# Altium PCB WiirdFlex Bottom.PcbDoc
Units mm, origin at the board's own origin, x right, y up, seen from the top; angles counter-clockwise.
Board outline 71 x 55 mm, 2 copper layers (Top Layer, Bottom Layer); 21 components, 64 nets, 158 pads, 0 vias.
Unrouted connection lines stored in the file: 31.
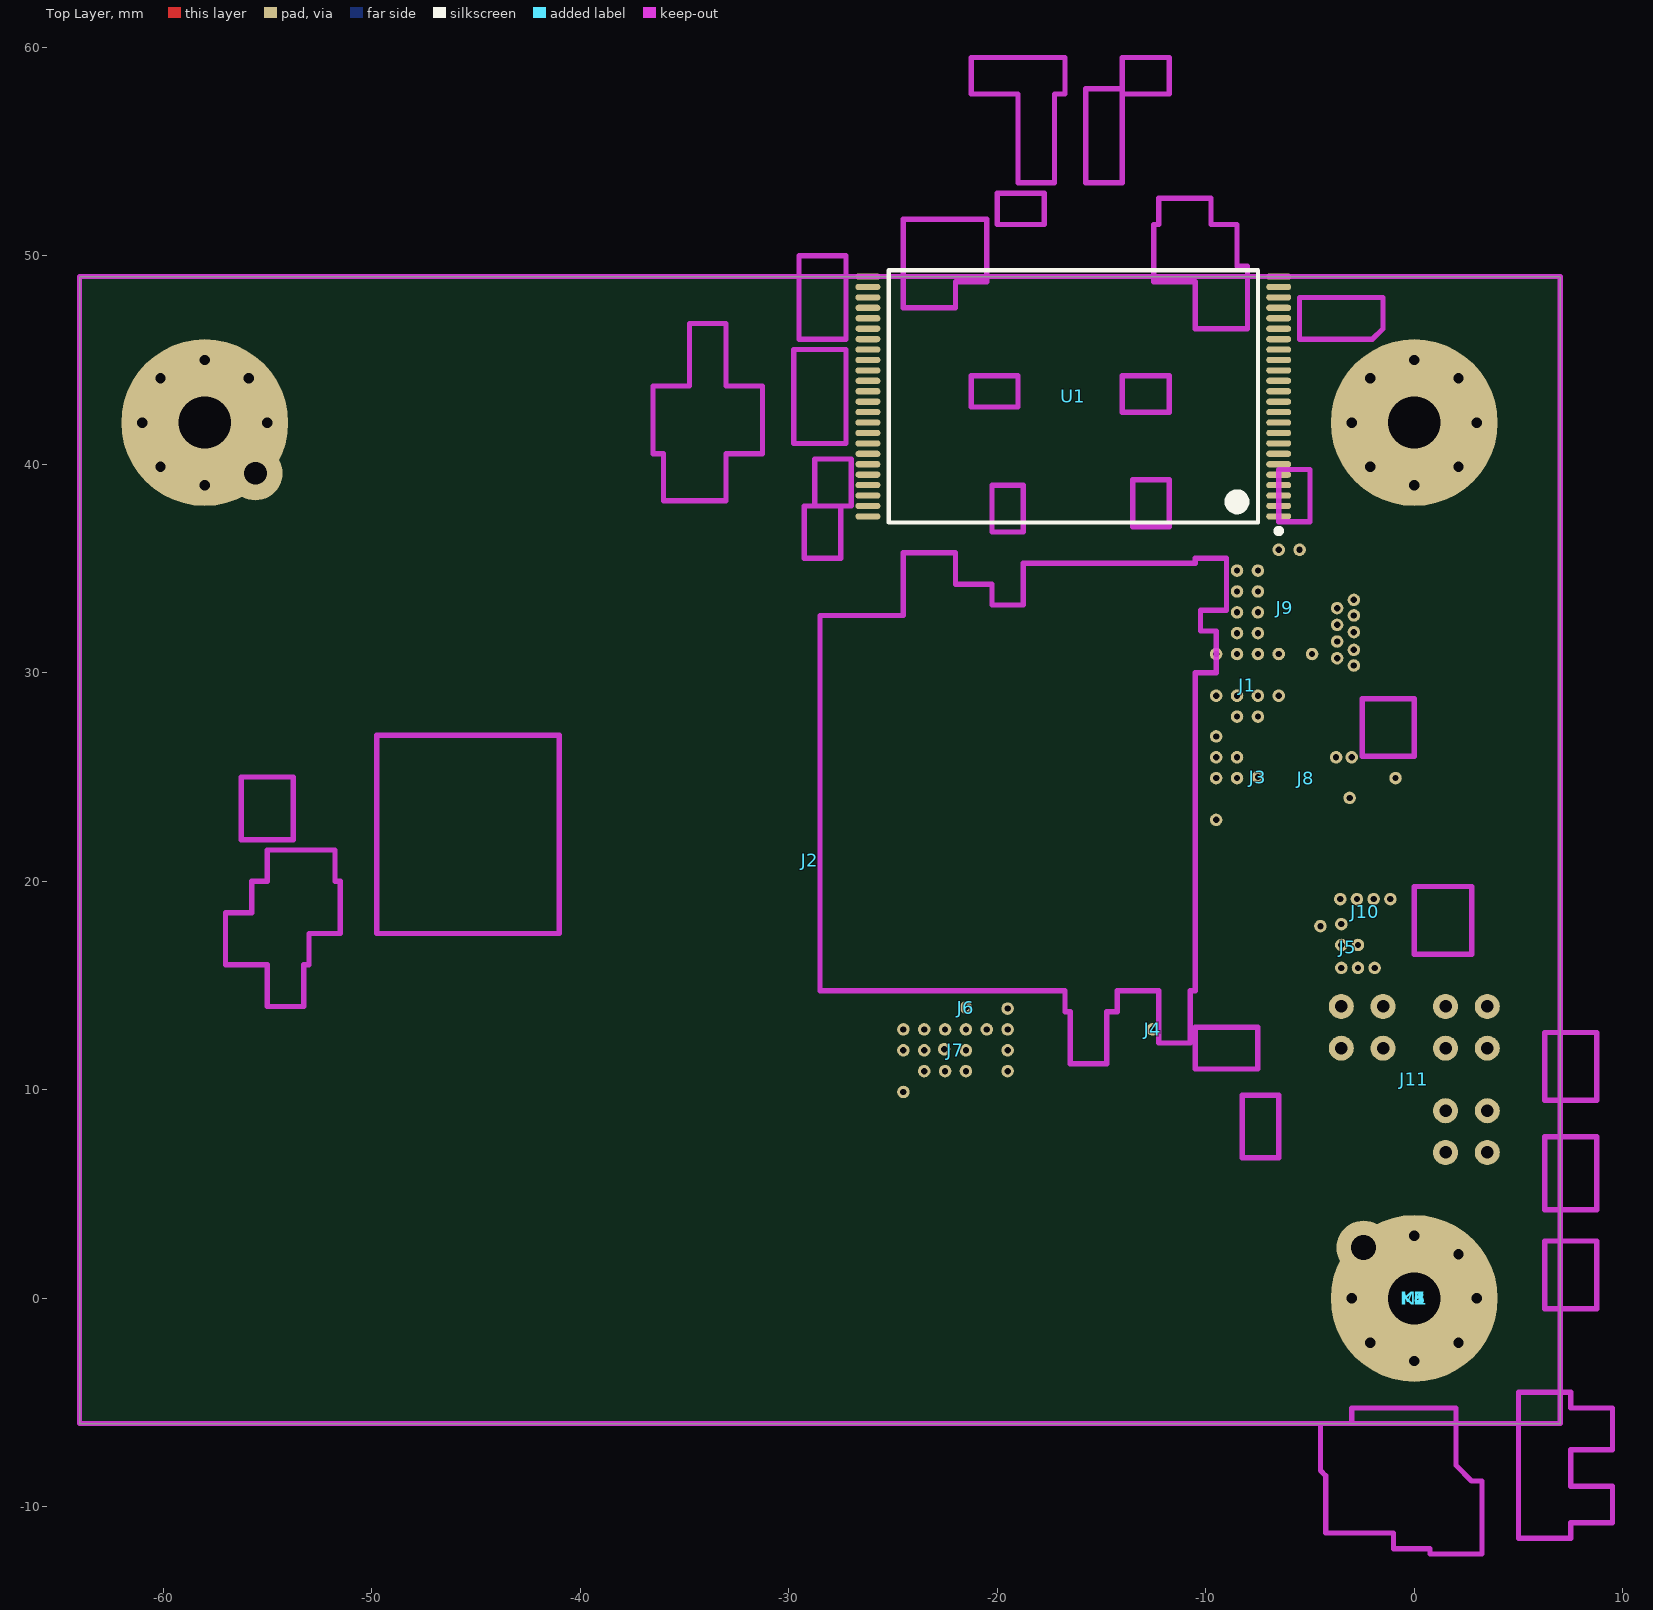
[diagram p0: Top Layer view]
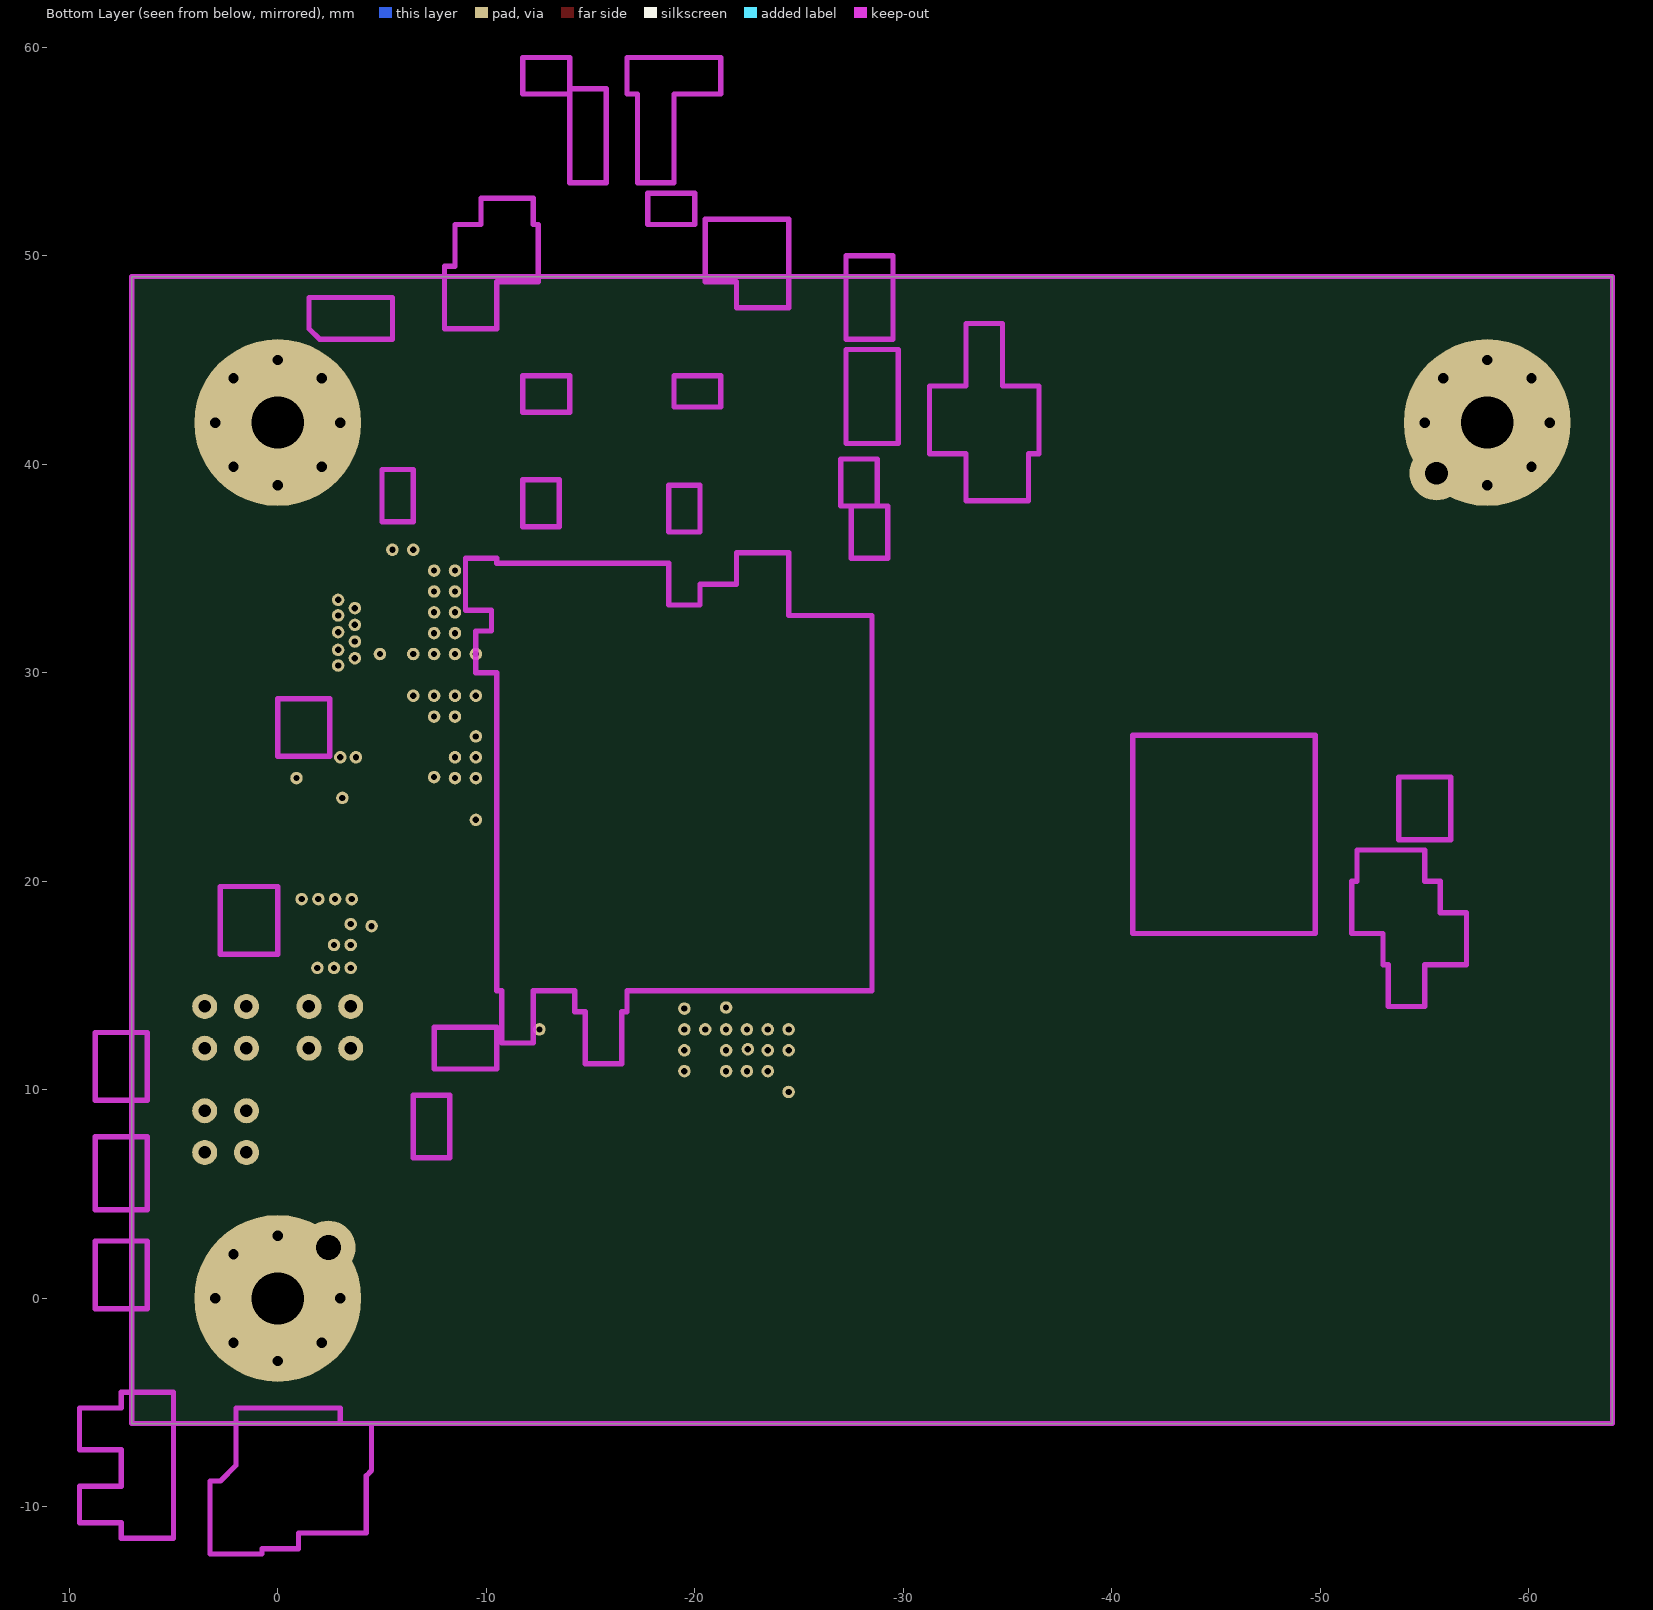
[diagram p1: Bottom Layer view, seen from below]

## Layer stack, top to bottom
Top Solder: solder mask 0.0102, Solder Resist, Dk 3.5
Top Layer: signal copper 0.0356
Dielectric 1: dielectric 0.32, FR-4, Dk 4.8
Bottom Layer: signal copper 0.0356
Bottom Solder: solder mask 0.0102, Solder Resist, Dk 3.5

## Board outline
-64,-6 7,-6 7,49 -64,49

## Design rules (kind name [scope] priority, off if disabled: settings)
Clearance [All] p1: gap=0.254 ignorepadtopadclearanceinfootprint=FALSE except(0: Arc-Hole Track-Hole SMDPad-Hole THPad-Hole Via-Hole Fill-Hole Poly-Hole Region-Hole Text-Hole)
PolygonConnect [All] p1: connectstyle=Relief reliefconductorwidth=0.254 reliefentries=4 polygonreliefangle="90 Angle" airgapwidth=0.254
RoutingVias [All] p1: holewidth=0.711 width=1.27 viastyle="Through Hole" minholewidth=0.711 minwidth=1.27 maxholewidth=0.711 maxwidth=1.27
SolderMaskExpansion [All] p1: expansion=0.102 istentingtop=FALSE
Width [All] p1: maxlimit=0.254 minlimit=0.254 preferedwidth=0.254
30 further rules are at their usual default settings.

## Classes and differential pairs
component class "WiirdFlex Bottom": K1 K2 K3 K4 K5 K6 K7 K8 M1
component class WiFi: J1
component class NAND: J9 U1
component class MX: J8
component class GameCube: J10 J11
component class AV: J6 J7
component class Misc: J2 J3 J4 J5

## Components (designator, comment, footprint, x,y, rotation, side; value= is the part's Value field where it differs from the comment)
J1 "RVK-1_WiFi" RVK-1_WIFI_VIAS 0,0 r0 top
J2 "RVK-1_Ground_MountingScrews" "RVK-1_GND_SCREWS - LMAO WITH EXTRA SCREWPOST" 0,0 r0 top locked
J3 "RVK-1_Reset" RVK-1_RESET 0,0 r0 top locked
J4 "RVK-1_Fan" RVK-1_FAN_PWM 0,0 r0 top
J5 "RVK-1_TestPoints" RVK-1_TESTPOINT_VIAS 0,0 r0 top
J6 "RVK-1_Video_Mode" RVK-1_VIDEO_MODE_VIA 0,0 r0 top
J7 "RVK-1_AVE_Relocation" RVK-1_AVE_VIAS 0,0 r0 top
J8 "RVK-1_MX_Relocation" RVK-1_MX 0,0 r0 top
J9 "RVK-1_NAND_Relocation" RVK-1_NAND_VIAS 0,0 r0 top
J10 "RVK-1_GameCube_Ports" RVK-1_GC_CONTROLLER_VIAS 0,0 r0 top locked
J11 "RVK-1_GameCube_MemoryCards" RVK-1_MEMCARD_TESTPOINTS 0,0 r0 top
K1 "Keepout: CPU" RVK-1_BOTTOM_KEEPOUT_CPU 0,0 r0 top locked
K2 "Keepout: GPU" RVK-1_BOTTOM_KEEPOUT_GPU 0,0 r0 top locked
K3 "Keepout: RAM" RVK-1_Bottom_Keepout_RAM 0,0 r0 top locked
K4 "Keepout: SD pull-ups" RVK-1_Bottom_Keepout_SD_Pullups 0,0 r0 top locked
K5 "Keepout: Controller pull-ups" RVK-1_Bottom_Keepout_Controller_Pullups 0,0 r0 top locked
K6 "Keepout: Mem card ESD protection" RVK-1_Bottom_Keepout_MemCard_ESD 0,0 r0 top locked
K7 "Keepout: USB ESD protection" RVK-1_Bottom_Keepout_USB_ESD 0,0 r0 top locked
K8 "Keepout: Fan power" RVK-1_Bottom_Keepout_Fan_Power 0,0 r0 top locked
M1 "Trim: LMAO (JL version)" "Wii Trim: LMAO with extra mounting hole" 0,0 r0 top locked
U1 "HY27UF082G2B" TSSOP50P2000X120-48N -16.35,43.25 r180 top

## Footprints (in the part's own frame and the unit in brackets; to place one, negate y for a bottom-side part, rotate by r counter-clockwise, add the part's x,y. Pads: shape width x height; smd on the part's side, far side on the other; paste and mask are expansions set on the pad)
RVK-1_AVE_VIAS [mm]
  round 0.6 hole 0.3: 1(-24.5,11.9) 2(-23.5,12.9) 3(-23.5,10.9) 6(-23.5,11.9) 7(-22.5,12.9) 8(-22.5,10.9) 11(-22.544,11.951) 13(-21.5,12.9) 14(-21.5,10.9) 19(-21.5,11.9) 20(-20.5,12.9) 25(-19.5,12.9) 27(-19.5,10.9) 29(-19.5,11.9) 31(-19.5,13.9) 64(-24.5,9.9) G(-24.5,12.9)
RVK-1_Bottom_Keepout_Controller_Pullups [mm] "Keepout area for GC Controller pull-up resistor array (RA1)"
  Keep-Out Layer lines w0.254: 0,16.5 2.75,16.5 2.75,19.75 0,19.75 0,16.5
RVK-1_BOTTOM_KEEPOUT_CPU [mm] "keepout area for various CPU-associated components (mostly power filtering)"
  Keep-Out Layer lines w0.254: -57,16 -57,18.5 -55.75,18.5 -55.75,20 -55,20 -55,21.5 -51.75,21.5 -51.75,20 -51.5,20 -51.5,17.5 -53,17.5 -53,16 -53.25,16 -53.25,14 -55,14 -55,16 -57,16 ; -56.25,22 -56.25,25 -53.75,25 -53.75,22 -56.25,22 ; -49.75,17.5 -41,17.5 -41,27 -49.75,27 -49.75,17.5
RVK-1_Bottom_Keepout_Fan_Power [mm] "keepout area for fan control and power components"
  Keep-Out Layer lines w0.254: -4.5,-8.25 -4.5,-6 -3,-6 -3,-5.25 2,-5.25 2,-8 2.75,-8.75 3.25,-8.75 3.25,-12.25 0.75,-12.25 0.75,-12 -1,-12 -1,-11.25 -4.25,-11.25 -4.25,-8.5 -4.5,-8.25
RVK-1_BOTTOM_KEEPOUT_GPU [mm] "Keep-out area for Wii bottom side of GPU, including related support components"
  Keep-Out Layer lines w0.254: -36.5,40.5 -36,40.5 -36,38.25 -33,38.25 -33,40.5 -31.25,40.5 -31.25,43.75 -33,43.75 -33,46.75 -34.75,46.75 -34.75,43.75 -36.5,43.75 -36.5,40.5 ; -29.75,41 -29.75,45.5 -27.25,45.5 -27.25,41 -29.75,41 ; -29.5,46 -29.5,50 -27.25,50 -27.25,46 -29.5,46 ; -29.25,35.5 -29.25,38 -27.5,38 -27.5,35.5 -29.25,35.5 ; -28.75,38 -28.75,40.25 -27,40.25 -27,38 -28.75,38 ; -28.5,14.75 -16.75,14.75 -16.75,13.75 -16.5,13.75 -16.5,11.25 -14.75,11.25 -14.75,13.75 -14.25,13.75 -14.25,14.75 -12.25,14.75 -12.25,12.25 -10.75,12.25 -10.75,14.75 -10.5,14.75 -10.5,30 -9.5,30 -9.5,32 -10.25,32 -10.25,33 -9,33 -9,35.5 -10.5,35.5 -10.5,35.25 -18.75,35.25 -18.75,33.25 -20.25,33.25 -20.25,34.25 -22,34.25 -22,35.75 -24.5,35.75 -24.5,32.75 -28.5,32.75 -28.5,14.75 ; -20.25,36.75 -18.75,36.75 -18.75,39 -20.25,39 -20.25,36.75 ; -13.5,37 -11.75,37 -11.75,39.25 -13.5,39.25 -13.5,37 ; -10.5,11 -10.5,13 -7.5,13 -7.5,11 -10.5,11 ; -8.25,6.75 -6.5,6.75 -6.5,9.75 -8.25,9.75 -8.25,6.75 ; -6.5,37.25 -5,37.25 -5,39.75 -6.5,39.75 -6.5,37.25
RVK-1_Bottom_Keepout_MemCard_ESD [mm] "Keepout area for GC Memory Card ESD-protection diode arrays (DA1, DA2, DA4)"
  Keep-Out Layer lines w0.254: 6.25,-0.5 6.25,2.75 8.75,2.75 8.75,-0.5 6.25,-0.5 ; 6.25,4.25 6.25,7.75 8.75,7.75 8.75,4.25 6.25,4.25 ; 6.25,9.5 6.25,12.75 8.75,12.75 8.75,9.5 6.25,9.5
RVK-1_Bottom_Keepout_RAM [mm] "keepout area for RAM-related support components (power conditioning, mainly)"
  Keep-Out Layer lines w0.254: -24.5,47.5 -22,47.5 -22,48.75 -20.5,48.75 -20.5,51.75 -24.5,51.75 -24.5,47.5 ; -21.25,42.75 -19,42.75 -19,44.25 -21.25,44.25 -21.25,42.75 ; -21.25,57.75 -21.25,59.5 -16.75,59.5 -16.75,57.75 -17.25,57.75 -17.25,53.5 -19,53.5 -19,57.75 -21.25,57.75 ; -20,51.5 -17.75,51.5 -17.75,53 -20,53 -20,51.5 ; -15.75,53.5 -15.75,58 -14,58 -14,53.5 -15.75,53.5 ; -14,42.5 -11.75,42.5 -11.75,44.25 -14,44.25 -14,42.5 ; -14,57.75 -14,59.5 -11.75,59.5 -11.75,57.75 -14,57.75 ; -12.5,48.75 -12.5,51.5 -12.25,51.5 -12.25,52.75 -9.75,52.75 -9.75,51.5 -8.5,51.5 -8.5,49.5 -8,49.5 -8,46.5 -10.5,46.5 -10.5,48.75 -12.5,48.75 ; -5.5,46 -5.5,48 -1.5,48 -1.5,46.5 -2,46 -5.5,46
RVK-1_Bottom_Keepout_SD_Pullups [mm] "Keep-out area for SD card detect and write protect pull-up resistors (R200, R201)"
  Keep-Out Layer lines w0.254: -2.5,26 0,26 0,28.75 -2.5,28.75 -2.5,26
RVK-1_Bottom_Keepout_USB_ESD [mm] "Keepout area for USB ESD protection diodes on bottom side"
  Keep-Out Layer lines w0.254: 5,-11.5 5,-4.5 7.5,-4.5 7.5,-5.25 9.5,-5.25 9.5,-7.25 7.5,-7.25 7.5,-9 9.5,-9 9.5,-10.75 7.5,-10.75 7.5,-11.5 5,-11.5
RVK-1_FAN_PWM [mm] "Via controlling fan from GPU.  Don't know if it's actually PWM or not, just guessing."
  round 0.6 hole 0.3: 1(-12.55,12.9)
RVK-1_GC_CONTROLLER_VIAS [mm]
  round 0.6 hole 0.3: 1(-1.95,19.15) 2(-1.15,19.15) 3(-2.75,19.15) 4(-3.55,19.15) G(-3.5,17.95)
"RVK-1_GND_SCREWS - LMAO WITH EXTRA SCREWPOST" [mm]
  round 1 hole 0.5: 1(-61,42) 1(-60.121,39.879) 1(-60.121,44.121) 1(-58,39) 1(-58,45) 1(-55.879,44.121) 1(-55,42) 1(-3,0) 1(-3,42) 1(-2.121,-2.121) 1(-2.121,39.879) 1(-2.121,44.121) 1(0,-3) 1(0,3) 1(0,39) 1(0,45) 1(2.121,-2.121) 1(2.121,2.121) 1(2.121,39.879) 1(2.121,44.121) 1(3,0) 1(3,42)
  round 8 hole 2.5: 1(-58,42) 1(0,0) 1(0,42)
  round 2.6 hole 1.1: 1(-55.568,39.568)
  round 2.6 hole 1.2: 1(-2.432,2.432)
RVK-1_MEMCARD_TESTPOINTS [mm] "Don't need these signals but they may be useful for mechanical attachment points"
  round 1.2 hole 0.6: 1(-3.5,14) 2(-1.5,14) 3(1.5,14) 4(3.5,14) 5(-3.5,12) 6(-1.5,12) 7(1.5,12) 8(3.5,12) 9(1.5,9) 10(3.5,9) 11(1.5,7) 12(3.5,7)
RVK-1_MX [mm] "Vias where the MX chip attaches to CPU and/or GPU on the bottom of a 4-layer Wii motherboard"
  round 0.6 hole 0.3: 5(-0.9,24.95) 7(-9.5,25.95) 11(-8.5,25.95) 12(-3,25.95) 13(-3.75,25.95) 14(-9.5,26.95) 15(-9.5,22.95) 20(-9.5,24.95) 24(-8.5,24.95) G(-3.1,24)
RVK-1_NAND_VIAS [mm]
  round 0.6 hole 0.3: 3.3V(-5.5,35.9) 6(-2.9,30.35) 7(-3.7,30.7) 8(-2.9,31.1) 9(-3.7,31.5) 10(-2.9,31.95) 16(-3.7,32.3) 17(-2.9,32.75) 18(-3.7,33.1) 19(-2.9,33.5) 29(-8.5,34.9) 30(-7.5,34.9) 31(-8.5,33.9) 32(-7.5,33.9) 41(-8.5,32.9) 42(-7.5,32.9) 43(-8.5,31.9) 44(-7.5,31.9) G(-9.5,30.9) G(-8.5,30.9) G(-7.5,30.9) G(-6.5,35.9) G(-4.9,30.9)
RVK-1_RESET [mm]
  round 0.6 hole 0.3: 1(-7.5,25)
RVK-1_TESTPOINT_VIAS [mm] "Vias near GPU associated with some test points on top layer"
  round 0.6 hole 0.3: 219(-2.7,16.95) 220(-4.5,17.85) 221(-3.5,16.95) 223(-3.5,15.85) 224(-2.7,15.85) 225(-1.9,15.85)
RVK-1_VIDEO_MODE_VIA [mm]
  round 0.6 hole 0.3: 1(-21.5,13.95)
RVK-1_WIFI_VIAS [mm]
  round 0.6 hole 0.3: 2(-6.5,30.9) 3(-9.5,28.9) 5(-8.5,28.9) 16(-7.5,27.9) 17(-8.5,27.9) 19(-6.5,28.9) G(-7.5,28.9)
TSSOP50P2000X120-48N [mm] "TSSOP, 48-Leads, Body 12.02x18.40mm, Pitch 0.50mm, IPC Medium Density"
  oval 1.2x0.3 smd: 1(-9.85,5.75) 2(-9.85,5.25) 3(-9.85,4.75) 4(-9.85,4.25) 5(-9.85,3.75) 6(-9.85,3.25) 7(-9.85,2.75) 8(-9.85,2.25) 9(-9.85,1.75) 10(-9.85,1.25) 11(-9.85,0.75) 12(-9.85,0.25) 13(-9.85,-0.25) 14(-9.85,-0.75) 15(-9.85,-1.25) 16(-9.85,-1.75) 17(-9.85,-2.25) 18(-9.85,-2.75) 19(-9.85,-3.25) 20(-9.85,-3.75) 21(-9.85,-4.25) 22(-9.85,-4.75) 23(-9.85,-5.25) 24(-9.85,-5.75) 25(9.85,-5.75) 26(9.85,-5.25) 27(9.85,-4.75) 28(9.85,-4.25) 29(9.85,-3.75) 30(9.85,-3.25) 31(9.85,-2.75) 32(9.85,-2.25) 33(9.85,-1.75) 34(9.85,-1.25) 35(9.85,-0.75) 36(9.85,-0.25) 37(9.85,0.25) 38(9.85,0.75) 39(9.85,1.25) 40(9.85,1.75) 41(9.85,2.25) 42(9.85,2.75) 43(9.85,3.25) 44(9.85,3.75) 45(9.85,4.25) 46(9.85,4.75) 47(9.85,5.25) 48(9.85,5.75)
  silkscreen extent -9.97,-6.05 8.85,6.57, body extent -10,-6.05 10,6.05, height 1.2
"Wii Trim: LMAO with extra mounting hole" [mm] "LMAO trim outline, from jefflongo's worklog at https://bitbuilt.net/forums/index.php?threads/wii-pocket.2709/"

## Part data
K1 K2 K3 K4 K5 K6 K7 K8 M1: library part Misc, "placeholder for footprints without pads - keepouts, trim outlines, etc", ClassName=Keepout
U1: "NAND flash chip used on WII"

## Nets (pads, with @x,y where several pads share a name; then routed paths per layer and width w, separated by ;. In a path a pad name is that pad's centre, name@x,y a point inside that pad or via, vN(x,y) a via of type N, cw(c..) or ccw(c..) an arc to the next point about the centre after c; other vN are vias at no path point)
3.3V: J9.3.3V U1.12 U1.37
GND: J9.G U1.13 U1.36
NetJ1_2: J1.2
NetJ1_3: J1.3
NetJ1_5: J1.5
NetJ1_16: J1.16
NetJ1_17: J1.17
NetJ1_19: J1.19
NetJ1_G: J1.G J2.1 J7.G J8.G J10.G
NetJ3_1: J3.1
NetJ4_1: J4.1
NetJ5_219: J5.219
NetJ5_220: J5.220
NetJ5_221: J5.221
NetJ5_223: J5.223
NetJ5_224: J5.224
NetJ5_225: J5.225
NetJ6_1: J6.1
NetJ7_1: J7.1
NetJ7_2: J7.2
NetJ7_3: J7.3
NetJ7_6: J7.6
NetJ7_7: J7.7
NetJ7_8: J7.8
NetJ7_11: J7.11
NetJ7_13: J7.13
NetJ7_14: J7.14
NetJ7_19: J7.19
NetJ7_20: J7.20
NetJ7_25: J7.25
NetJ7_27: J7.27
NetJ7_29: J7.29
NetJ7_31: J7.31
NetJ7_64: J7.64
NetJ8_5: J8.5
NetJ8_7: J8.7
NetJ8_11: J8.11
NetJ8_12: J8.12
NetJ8_13: J8.13
NetJ8_14: J8.14
NetJ8_15: J8.15
NetJ8_20: J8.20
NetJ8_24: J8.24
NetJ9_6: J9.6 U1.6
NetJ9_7: J9.7 U1.7
NetJ9_8: J9.8 U1.8
NetJ9_9: J9.9 U1.9
NetJ9_10: J9.10 U1.10
NetJ9_16: J9.16 U1.16
NetJ9_17: J9.17 U1.17
NetJ9_18: J9.18 U1.18
NetJ9_19: J9.19 U1.19
NetJ9_29: J9.29 U1.29
NetJ9_30: J9.30 U1.30
NetJ9_31: J9.31 U1.31
NetJ9_32: J9.32 U1.32
NetJ9_41: J9.41 U1.41
NetJ9_42: J9.42 U1.42
NetJ9_43: J9.43 U1.43
NetJ9_44: J9.44 U1.44
NetJ10_1: J10.1
NetJ10_2: J10.2
NetJ10_3: J10.3
NetJ10_4: J10.4
pads on no net: J11.1 J11.2 J11.3 J11.4 J11.5 J11.6 J11.7 J11.8 J11.9 J11.10 J11.11 J11.12 U1.1 U1.2 U1.3 U1.4 U1.5 U1.11 U1.14 U1.15 U1.20 U1.21 U1.22 U1.23 U1.24 U1.25 U1.26 U1.27 U1.28 U1.33 U1.34 U1.35 U1.38 U1.39 U1.40 U1.45 U1.46 U1.47 U1.48

## Keep-outs
Keep-Out Layer:
  lines w0.254: -64,-6 -64,49 7,49 7,-6 -9,-6 -64,-6